# Altium PCB SkateBoardPCB.PcbDoc
Units mil, origin at the board's own origin, x right, y up, seen from the top; angles counter-clockwise.
Board outline 2755.91 x 1315 mil, 2 copper layers (Top Layer, Bottom Layer); 36 components, 35 nets, 205 pads, 0 vias.
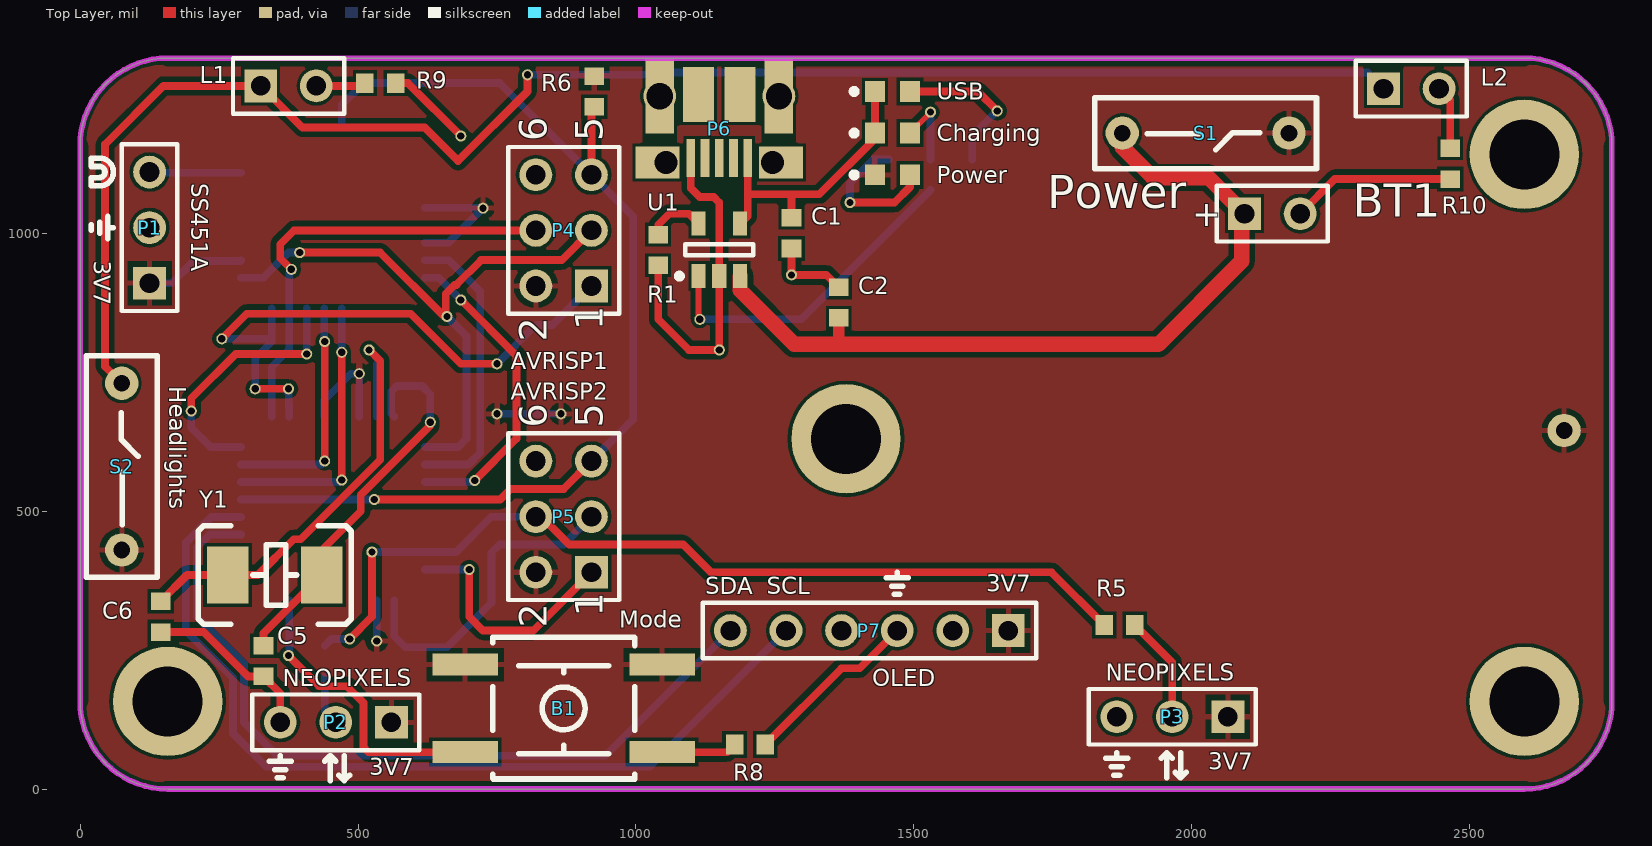
[diagram p0: Top Layer view]
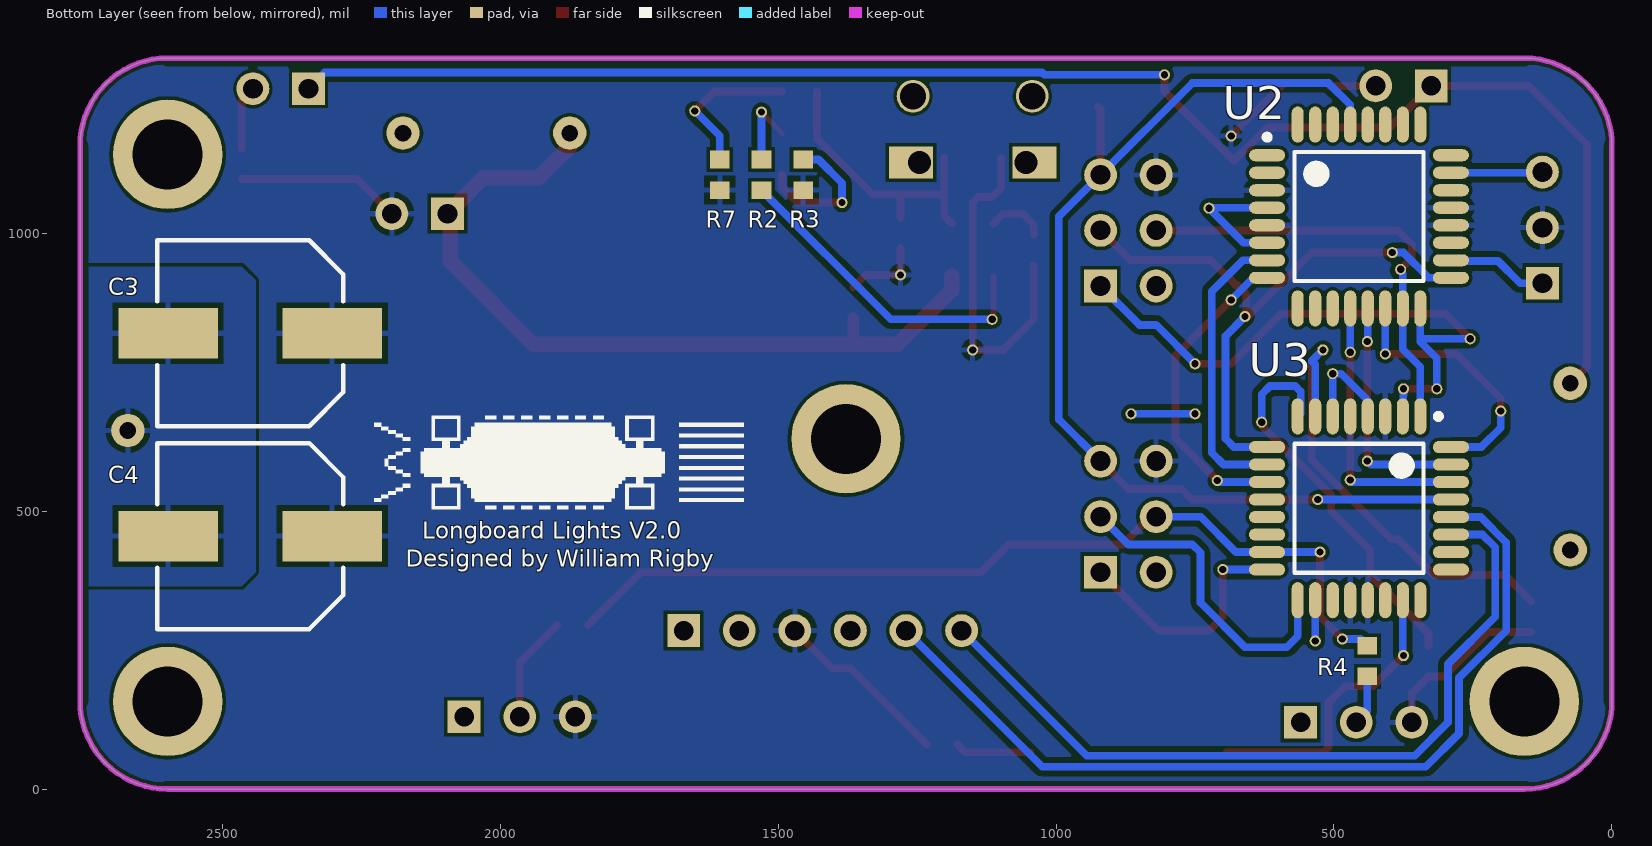
[diagram p1: Bottom Layer view, seen from below]

## Layer stack, top to bottom
Top Solder: solder mask 0.4, Solder Resist, Dk 3.5
Top Layer: signal copper 1.4
Dielectric 1: dielectric 12.6, FR-4, Dk 4.8
Bottom Layer: signal copper 1.4
Bottom Solder: solder mask 0.4, Solder Resist, Dk 3.5

## Board outline
0,157.48 0,1157.52 cw(c157.48,1157.52) 157.48,1315 2598.43,1315 cw(c2598.43,1157.52) 2755.91,1157.52 2755.91,157.48 cw(c2598.43,157.48) 2598.43,0 157.48,0 cw(c157.48,157.48)

## Design rules (kind name [scope] priority, off if disabled: settings)
Clearance [All] p1: gap=6 except(10: Track-Poly; 15: Track-Region)
HoleSize [All] p1: absolutevalues=TRUE maxlimit=196.85 minlimit=0.98 maxpercent=80.000 minpercent=20.000
MinimumSolderMaskSliver [All] p1: minsoldermaskwidth=0.4
PolygonConnect [All] p1: connectstyle=Relief reliefconductorwidth=10 reliefentries=4 polygonreliefangle="90 Angle" airgapwidth=10
RoomDefinition Sheet1 [InComponentClass('Sheet1')] p1: confinementstyle=ConfineIn formatcopy=TRUE lockcomponents=FALSE outline 0,0 2775,0 2775,1315 0,1315
RoutingVias [All] p1: holewidth=28 width=50 viastyle="Through Hole" minholewidth=28 minwidth=50 maxholewidth=28 maxwidth=50
SilkToSilkClearance [All] p1: silktosilkclearance=0.1
SilkToSolderMaskClearance [IsPad] p1: minsilkscreentomaskgap=0.4 clearancetoexposedcopper=TRUE
SolderMaskExpansion [All] p1: expansion=4
Width [All] p1: maxlimit=120 minlimit=6 preferedwidth=14
26 further rules are at their usual default settings.

## Components (designator, comment, footprint, x,y, rotation, side; value= is the part's Value field where it differs from the comment)
B1 "Mode" SPST-NO 870,145 r180 top
BT1 "Battery" BAT-2 2145,1035 r0 top
C1 "Cap Semi" 1608[0603] 1280,1000 r90 top
C2 "Cap Semi" 1608[0603] 1365,875 r270 top
C3 "Cap Semi" CAPAE9983X105M 2450,820 r0 bottom
C4 "Cap Semi" CAPAE9983X105M 2450,455 r0 bottom
C5 "Cap Semi" 1608[0603] 330,230 r90 top
C6 "Cap Semi" 1608[0603] 145,310 r90 top
Charging "LED" LED0603 1461.5,1180 r0 top
L1 "LED" HDR1X2 325,1265 r0 top
L2 "LED" HDR1X2 2345,1260 r0 top
P1 "SS451A" HDR1X3 125,910 r90 top
P2 "NEOPIXELS" HDR1X3 560,120 r180 top
P3 "NEOPIXELS" HDR1X3 2065,130 r180 top
P4 "AVRISP1" HDR2X3 920,905 r90 top
P5 "AVRISP2" HDR2X3 920,390 r90 top
P6 "USB Micro B Connector" "USB Micro B Connector" 1150,1246.5 r180 top
P7 "OLED" HDR1X6 1670,285 r180 top
Power "LED" LED0603 1461.5,1105 r0 top
R1 "Res1" 1608[0603] 1040,970 r90 top
R2 "Res1" 1608[0603] 1530,1105 r90 bottom
R3 "Res1" 1608[0603] 1455,1105 r90 bottom
R4 "Res1" 1608[0603] 440,230 r270 bottom
R5 "Res1" 1608[0603] 1870,295 r0 top
R6 "Res1" 1608[0603] 925,1255 r270 top
R7 "Res1" 1608[0603] 1605,1105 r90 bottom
R8 "Res1" 1608[0603] 1205,80 r180 top
R9 "Res1" 1608[0603] 540,1270 r180 top
R10 "Res1" 1608[0603] 2465,1125 r90 top
S1 "Power" "Slide Switch 2.54mm" 1875,1180 r0 top
S2 "Headlights" "Slide Switch 2.54mm" 75,430 r90 top
U1 "MCP73831T-5ACI/OT" SOT-23-OT5_N 1150,970 r90 top
U2 "ATmega328P-AU" 32A_N 455,1030 r180 bottom
U3 "ATmega328P-AU" 32A_N 455,505 r270 bottom
USB "LED" LED0603 1461.5,1255 r0 top
Y1 "16MHz Crystal" "16MHz Clock" 350,385 r180 top

## Footprints (in the part's own frame and the unit in brackets; to place one, negate y for a bottom-side part, rotate by r counter-clockwise, add the part's x,y. Pads: shape width x height; smd on the part's side, far side on the other; paste and mask are expansions set on the pad)
"16MHz Clock" [mm]
  rect 1.9x2.6 smd: 1(-2.15,0) 2(2.15,0)
  silkscreen extent -3.5,-2.25 3.5,2.25
32A_N [mm] "Thin QFP, 32-Leads, Body 7x7mm, Pitch 0.8mm, IPC Medium Density"
  oval 1.65x0.55 smd: 1(-4.2,2.8) 2(-4.2,2) 3(-4.2,1.2) 4(-4.2,0.4) 5(-4.2,-0.4) 6(-4.2,-1.2) 7(-4.2,-2) 8(-4.2,-2.8) 17(4.2,-2.8) 18(4.2,-2) 19(4.2,-1.2) 20(4.2,-0.4) 21(4.2,0.4) 22(4.2,1.2) 23(4.2,2) 24(4.2,2.8)
  oval 0.55x1.65 smd: 9(-2.8,-4.2) 10(-2,-4.2) 11(-1.2,-4.2) 12(-0.4,-4.2) 13(0.4,-4.2) 14(1.2,-4.2) 15(2,-4.2) 16(2.8,-4.2) 25(2.8,4.2) 26(2,4.2) 27(1.2,4.2) 28(0.4,4.2) 29(-0.4,4.2) 30(-1.2,4.2) 31(-2,4.2) 32(-2.8,4.2)
  silkscreen extent -4.33,-2.95 2.95,3.75, body extent -3.5,-3.5 3.5,3.5, height 1.2
1608[0603] [mm] "Chip Capacitor, Body 1.6x0.8mm, IPC High Density"
  rect 0.8x0.9 smd: 1(-0.7,0) 2(0.7,0)
  body extent -0.87,-0.48 0.87,0.48, height 1.3
BAT-2 [mm] "Battery; 2 Leads"
  rect 1.5x1.5 hole 0.9: 1(-1.27,0)
  round 1.5 hole 0.9: 2(1.27,0)
  silkscreen extent -2.54,-1.27 2.54,1.27
CAPAE9983X105M [mm] "Aluminum Electrolytic Capacitor, Body 8.30x8.30x10.50mm, IPC Low Density"
  rect 4.55x2.3 smd: 1(-3.75,0) 2(3.75,0)
  silkscreen extent -4.25,-4.25 4.25,4.25, body extent -4.25,-4.25 4.25,4.25, height 10.5
HDR1X2 [mm] "Connector; Header; 2 Position"
  rect 1.5x1.5 hole 0.9: 1(0,0)
  round 1.5 hole 0.9: 2(2.54,0)
  silkscreen extent -1.27,-1.27 3.81,1.27
HDR1X3 [mm] "Connector; Header; 3 Position"
  rect 1.5x1.5 hole 0.9: 1(0,0)
  round 1.5 hole 0.9: 2(2.54,0) 3(5.08,0)
  silkscreen extent -1.27,-1.27 6.35,1.27
HDR1X6 [mm] "Connector; Header; 6 Position"
  rect 1.5x1.5 hole 0.9: 1(0,0)
  round 1.5 hole 0.9: 2(2.54,0) 3(5.08,0) 4(7.62,0) 5(10.16,0) 6(12.7,0)
  silkscreen extent -1.27,-1.27 13.97,1.27
HDR2X3 [mm] "Connector; Header; 3x2 Position"
  rect 1.5x1.5 hole 0.9: 1(0,0)
  round 1.5 hole 0.9: 2(0,2.54) 3(2.54,0) 4(2.54,2.54) 5(5.08,0) 6(5.08,2.54)
  silkscreen extent -1.27,-1.27 6.35,3.81
LED0603 [mm]
  rect 0.9x0.95 smd: 1(-0.8,0) 2(0.8,0)
  silkscreen extent -1.87,-0.12 -1.62,0.12
"Slide Switch 2.54mm" [mil]
  round 60 hole 30: 1(0,0) 2(300,0)
  silkscreen extent -49,-64 349,64
SOT-23-OT5_N [mm] "SOT23, 5-Leads, Body 2.9x1.6mm, Pitch 0.95mm, Lead Span 2.7mm, IPC Medium Density"
  rect 1.1x0.65 smd: 1(-1.2,0.95) 2(-1.2,0) 3(-1.2,-0.95) 4(1.2,-0.95) 5(1.2,0.95)
  silkscreen extent -1.32,-1.55 0.25,1.95, body extent -0.9,-1.55 0.9,1.55, height 1.45
SPST-NO [mm]
  rect 3x1 smd: 1(-4.5,2) 2(-4.5,-2) 3(4.5,-2) 4(4.5,2)
  silkscreen extent -3.25,-3.25 3.25,3.23
"USB Micro B Connector" [mm]
  rect 0.4x1.75 smd: D+(0,2.825) D-(-0.65,2.825) GND(1.3,2.825) ID(0.65,2.825) VBUS(-1.3,2.825)
  rect 2x1.46 all layers, no hole: Mount(-2.825,3.03) Mount(2.825,3.03)
  round 1.5 hole 1.2: Mount(-2.725,0) Mount(2.725,0)
  rect 1.3x3.4 smd: Mount(-2.725,0) Mount(2.725,0)
  round 1.2 hole 1.05: Mount(-2.425,3.03) Mount(2.425,3.03)
  rect 1.425x2.5 smd: Mount(-0.95,-0.075) Mount(0.95,-0.075)

## Part data
B1: library part Switch
BT1: "Multicell Battery"
C1 C2 C3 C4 C5 C6: "Capacitor (Semiconductor SIM Model)"
Charging L1 L2 Power USB: library part LED3, "Typical BLUE SiC LED"
P1 P2 P3: library part "Header 3", "Header, 3-Pin"
P4 P5: library part AVRISP
P7: library part "Header 6", "Header, 6-Pin"
R1 R2 R3 R4 R5 R6 R7 R8 R9 R10: "Resistor"
S1 S2: library part "Slide Switch"
U1: "Miniature Single-Cell, Fully Integrated Li-Ion, Li-Polymer Charge Management Controller, 4.5V, 5-Pin SOT-23, Industrial Temperature, Tape and Reel"
U2 U3: "8-bit AVR Microcontroller, 32KB Flash, 1KB EEPROM, 2KB SRAM, 32-pin TQFP, Industrial Grade (-40°C to 85°C)"

## Free pads (board coordinates)
  round 20 hole 13: 2(200,680) 2(255,810) 2(315,720) 2(375,240) 2(375,720) 2(380,935) 2(395,965) 2(407.76,782.76) 2(440,590) 2(440,805) 2(470.75,555.75) 2(470.75,785.75) 2(485,270) 2(502.24,747.24) 2(520,790) 2(525,426.26) 2(529.25,520.75) 2(533.74,266.26) 2(630,660) 2(660,850) 2(685,880) 2(685,1175) 2(700,395) 2(710,555) 2(725,1045) 2(750,675) 2(750,765) 2(805,1285) 2(865,675) 2(1115,845) 2(1150,790) 2(1280,925) 2(1385,1055) 2(1530,1217.78) 2(1650,1220)
  round 60 hole 30: 3(2670,645)
  round 196.85 hole 125.98: 4(157.48,157.48) 4(1377.95,629.92) 4(2598.43,157.48) 4(2598.43,1141.73)

## Nets (pads, with @x,y where several pads share a name; then routed paths per layer and width w, separated by ;. In a path a pad name is that pad's centre, name@x,y a point inside that pad or via, vN(x,y) a via of type N, cw(c..) or ccw(c..) an arc to the next point about the centre after c; other vN are vias at no path point)
3.7V: B1.2 B1.3 C3.2 C4.2 P1.1 P2.1 P3.1 P4.2 P5.2 P7.1 pad.2@502.24,747.24 pad.2@533.74,266.26 pad.2@725,1045 pad.2@750,675 pad.2@865,675 pad.3 Power.1 R6.1 S1.2 S2.1 U2.4 U2.6 U2.18 U3.4 U3.6 U3.18 | length 794.2
  Bottom Layer w14: P1.1 165,910 205,950 288.39,950 U2.18 ; U3.4 439.25,699.25 487.24,747.24 502.24,747.24 U3.6 ; pad.2@533.74,266.26 U3.18 ; U2.6 662.76,982.76 725,1045 724.25,1045.75 U2.4 ; pad.2@750,675 pad.2@865,675
+5V: C1.2 Charging.1 P6.VBUS U1.4 USB.1 | length 521.4
  Top Layer w10: Charging.1@1430,1170 Charging.1
  Top Layer w14: U1.4 1201.18,1031.02 1201.18,1070 ; P6.VBUS 1201.18,1070 ; C1.2 1280,1070 ; Charging.1@1430,1170 1330,1070 1280,1070 ; Charging.1 USB.1 ; 1201.18,1070 1280,1070
"BUTTON 1": B1.4 pad.2@375,240 U3.23 | length 536.8
  Top Layer w14: pad.2@375,240 430,185 480,185 510,155 510,75 518.74,66.26 B1.4
  Bottom Layer w14: pad.2@375,240 376.26,241.26 U3.23
"BUTTON 2": U3.24
"DATA 0": pad.2@470.75,555.75 pad.2@470.75,785.75 U2.12 U3.30 | length 491.5
  Top Layer w14: pad.2@470.75,555.75 pad.2@470.75,785.75
  Bottom Layer w14: U3.30 467.24,552.24 pad.2@470.75,555.75 ; pad.2@470.75,785.75 U2.12
"DATA 1": pad.2@440,590 pad.2@440,805 U2.13 U3.31 | length 426.8
  Top Layer w14: pad.2@440,590 pad.2@440,805
  Bottom Layer w14: U3.31 433.74,583.74 pad.2@440,590 ; pad.2@439.25,805.75 U2.13
"DATA 2": pad.2@200,680 pad.2@407.76,782.76 U2.14 U3.32 | length 479.6
  Top Layer w14: pad.2@200,680 200,702.76 280,782.76 pad.2@407.76,782.76
  Bottom Layer w14: pad.2@200,680 200,650 234.76,615.24 U3.32 ; pad.2@407.76,782.76 U2.14
"DATA 3": P4.4 pad.2@380,935 U2.15 U3.1 | length 801.7
  Top Layer w14: pad.2@380,935 360,955 360,980 385,1005 P4.4
  Bottom Layer w14: U3.1 344.76,759.76 376.26,791.26 U2.15 376.26,927.32 pad.2@381.97,933.03
"DATA 4": P4.1 pad.2@255,810 pad.2@315,720 pad.2@375,720 pad.2@750,765 U2.16 U3.2 | length 1137.5
  Top Layer w14: pad.2@255,810 300,855 595,855 685,765 pad.2@750,765 ; pad.2@315,720 pad.2@375,720
  Bottom Layer w14: pad.2@255,810 339.53,810 344.76,804.76 ; pad.2@315,720 315,775 344.76,804.76 ; U2.16 344.76,804.76 ; pad.2@375,720 U3.2 ; pad.2@750,765 820,835 850,835 P4.1
"DATA 5": P4.3 pad.2@395,965 pad.2@660,850 U2.17 U3.9 | length 1103.1
  Top Layer w14: pad.2@395,965 540,965 655,850 660,850 658,852 658,891.18 673.82,907 677,907 721.53,951.53 866.53,951.53 P4.3
  Bottom Layer w14: U2.17 329.76,919.76 375,965 pad.2@395,965 ; U3.9 680.24,615.24 695,630 695,815 pad.2@660,850
"DATA 6": U2.7 U3.10 | length 521.4
  Bottom Layer w14: U3.10 698.74,583.74 720,605 720,895 663.74,951.26 U2.7
"DATA 7": pad.2@685,880 pad.2@710,555 U2.8 U3.11 | length 569.4
  Top Layer w14: pad.2@685,880 785,780 785,630 pad.2@710,555
  Bottom Layer w14: U3.11 707.24,552.24 pad.2@710,555 ; U2.8 645.24,919.76 pad.2@685,880
GND: BT1.2 C1.1 C2.1 C3.1 C4.1 C5.1 C6.1 P1.2 P2.3 P3.3 P4.6 P5.6 P6.GND P7.3 pad.2@685,1175 pad.2@1150,790 pad.2@1280,925 R1.1 R3.1 R7.1 R8.1 R9.1 R10.1 U1.2 U2.3 U2.5 U2.20 U2.21 U3.3 U3.5 U3.20 U3.21 | length 1844.5
  Top Layer w14: C6.1 222.56,282.44 302.56,202.44 C5.1 360,172.44 P2.3 ; R9.1 590,1270 pad.2@685,1175 ; R1.1 1040,845 1095,790 1150,790 U1.2 1150,1055 1140,1065 1115,1065 1098.82,1081.18 P6.GND ; R8.1 1370,217.44 1402.44,217.44 P7.3 ; C1.1 1280,925 1342.56,925 C2.1 ; P3.3@1862.56,127.56 P3.3 ; BT1.2 2257.44,1097.44 R10.1
"HALL EFFECT": P1.3 U2.23 | length 165.2
  Bottom Layer w14: P1.3 126.26,1108.74 U2.23
MISO2: P5.1 pad.2@700,395 U3.16 | length 438.6
  Top Layer w14: pad.2@700,395 700,310 725,285 815,285 P5.1
  Bottom Layer w14: U3.16 699.76,394.76 pad.2@700,395
MOSI2: P5.4 pad.2@485,270 pad.2@525,426.26 R4.1 R5.1 U3.15 | length 1647.6
  Top Layer w14: pad.2@485,270 525,310 pad.2@525,426.26 ; P5.4 830,490 880,440 1085,440 1135,390 1747.44,390 R5.1
  Bottom Layer w14: R4.1 452.44,270 pad.2@485,270 ; pad.2@525,426.26 U3.15 676.26,426.26 740,490 P5.4
NetB1_1: B1.1 R8.2 | length 136
  Top Layer w14: B1.1 1163.7,66.26 R8.2
NetC5_2: C5.2 pad.2@630,660 U3.8 Y1.1 | length 703.9
  Top Layer w14: C5.2 330,280.35 Y1.1 434.65,429.65 505,500 505,529.02 630,654.02 pad.2@630,660
  Bottom Layer w14: U3.8 560,675.59 560,715 570,725 615,725 630,710 pad.2@630,660
NetC6_2: C6.2 pad.2@520,790 U3.7 Y1.2 | length 836.9
  Top Layer w14: C6.2 192.44,385 Y1.2 320.06,385 384.24,449.18 396.71,449.18 540,592.47 540,770 pad.2@520,790
  Bottom Layer w14: pad.2@520,790 540,770 533.74,763.74 U3.7
NetCharging_2: Charging.2 pad.2@1530,1217.78 R2.2 | length 138.3
  Top Layer w10: Charging.2 1530,1217.01 pad.2@1530,1217.78
  Bottom Layer w14: R2.2 pad.2@1530,1217.78
NetL1_1: L1.1 L2.1 pad.2@805,1285 S2.2 | length 2937.3
  Top Layer w14: S2.2 45,760 45,1160 150,1265 L1.1 400,1190 620,1190 680,1130 805,1255 pad.2@805,1285
  Bottom Layer w14: pad.2@805,1285 1021.08,1285 1025.1,1289.02 2315.98,1289.02 L2.1
NetL1_2: L1.2 R9.2 | length 89.5
  Top Layer w14: L1.2 507.44,1265 R9.2
NetL2_2: L2.2 R10.2 | length 87.4
  Top Layer w14: R10.2 L2.2@2465,1240
NetP2_2: P2.2 R4.2 | length 90.7
  Bottom Layer w14: R4.2 440,140 P2.2
NetP3_2: P3.2 R5.2 | length 192.9
  Top Layer w14: R5.2 1965,227.56 P3.2
NetPower_2: pad.2@1385,1055 Power.2 R3.2 | length 264.2
  Top Layer w14: pad.2@1385,1055 1465,1055 1492.99,1082.99 Power.2
  Bottom Layer w14: pad.2@1385,1055 1385,1090 1427.56,1132.56 R3.2
NetR1_2: R1.2 U1.5 | length 105.7
  Top Layer w14: R1.2 1040,1015 1060,1035 1094.84,1035 U1.5
NetR2_1: pad.2@1115,845 R2.1 U1.1 | length 590
  Top Layer w10: U1.1 1112.6,847.4 pad.2@1115,845
  Bottom Layer w14: pad.2@1115,845 1297.56,845 R2.1
NetR7_2: pad.2@1650,1220 R7.2 USB.2 | length 277.6
  Top Layer w14: USB.2 1615,1255 pad.2@1650,1220
  Bottom Layer w14: R7.2 1605,1175 pad.2@1650,1220
"OLED RST": U3.26
RESET: P4.5 P5.5 pad.2@529.25,520.75 R6.2 U2.29 U3.29 | length 1929.9
  Top Layer w14: pad.2@529.25,520.75 755.75,520.75 775,540 870,540 P5.5 ; P4.5 920,1222.44 R6.2
  Bottom Layer w14: U3.29 pad.2@529.25,520.75 ; U2.29 470.75,1230.75 510,1270 755,1270 P4.5 995,1030 995,665 P5.5
SCK2: P5.3 U3.17 | length 587.9
  Bottom Layer w14: U3.17 565.24,274.76 585,255 660,255 740,335 740,425 755,440 870,440 P5.3 P5.3@910,490
SCL: P7.5 U3.28 | length 1618.5
  Bottom Layer w14: U3.28 235.97,489.25 190,443.28 190,285 275,200 275,100 335,40 1025,40 P7.5
SDA: P7.6 U3.27 | length 1432.3
  Bottom Layer w14: U3.27 232.76,457.76 210,435 210,310 295,225 295,120 355,60 945,60 P7.6
VBAT: BT1.1 C2.2 S1.1 U1.3 | length 1455.4
  Top Layer w20: 1365,800 C2.2
  Top Layer w28: U1.3 1187.4,897.6 1285,800 1365,800 1940,800 2090,950 2090,1040 2030,1100 1930,1100 1875,1155 S1.1
pads on no net: P6.D+ P6.D- P6.ID P6.Mount P7.2 P7.4 U2.1 U2.2 U2.9 U2.10 U2.11 U2.19 U2.22 U2.24 U2.25 U2.26 U2.27 U2.28 U2.30 U2.31 U2.32 U3.12 U3.13 U3.14 U3.19 U3.22 U3.25

## Polygon pours and split planes (outlines as drawn)
3.7V on Top Layer "Top Layer-3V7" (solid, pour order 2): 157.48,0 2670,0 2680,10 2745,75 2745,80 2745,95 2750,100 2755.91,105.91 2755.91,157.48 2755.91,1229.09 2745,1240 2710,1275 2710,1280 2675,1315 2598.43,1315 135,1315 125,1315 105,1315 95,1305 90,1300 70,1300 70,1295 50,1275 35,1260 25,1260 25,1240 15,1230 0,1215 0,1195 0,1165 0,145 0,110 5,105 10,100 10,75 25,60 55,30 55,25 75,25 90,10 100,0 125,0
3.7V on Bottom Layer "3.7V_L02_P000" (solid, pour order 0): 2440,915 2465,940 2690,940 2755.91,940 2755.91,365 2690,365 2465,365 2440,390
GND on Bottom Layer "Bottom Layer GND" (solid, remove dead copper, pour order 4): 90,-5 2715,-5 2725,5 2785,65 2785,290 2785,1310 2780,1315 2765,1330 55,1330 50,1330 -25,1255 -20,1250 -20,110

## Keep-outs
Keep-Out Layer:
  the board outline again, w10

## Silkscreen, mask and mechanical layers (free items; w line width, h text height)
Top Overlay:
  lines w10: 20,1005 20,1015 ; 35,1000 35,1010 35,1020 ; 50,990 50,1010 ; 50,1030 50,1010 ; 60,1010 50,1010 ; 340,50 360,50 ; 350,35 360,35 370,35 ; 355,20 365,20 ; 360,60 360,50 ; 380,50 360,50 ; 440,50 450,60 ; 450,15 450,60 ; 460,50 450,60 ; 465,25 475,15 ; 475,60 475,15 ; 485,25 475,15 ; 1450,380 1470,380 ; 1460,365 1470,365 1480,365 ; 1465,350 1475,350 ; 1470,390 1470,380 ; 1490,380 1470,380 ; 1845,55 1865,55 ; 1855,40 1865,40 1875,40 ; 1860,25 1870,25 ; 1865,65 1865,55 ; 1885,55 1865,55 ; 1945,55 1955,65 ; 1955,20 1955,65 ; 1965,55 1955,65 ; 1970,30 1980,20 ; 1980,65 1980,20 ; 1990,30 1980,20 ; 20,1085 20,1100 35,1100 ccw(c35,1110) 35,1120 20,1120 20,1135 35,1135 cw(c35,1110) 35,1085 20,1085
  text "3V7" at 25,950 h30 r270
  text "3V7" at 1630,355 h30
  text "SDA" at 1125,350 h30
  text "SCL" at 1235,350 h30
  text "3V7" at 2030,35 h30
  text "3V7" at 520,25 h30
Bottom Overlay:
  drawing of 33 lines, arcs and shapes, not listed
  text "Longboard Lights V2.0" at 2140,450 h30
  text "Designed by William Rigby" at 2170,400 h30

## Text inside footprints (layer, text, board x,y; h text height)
BT1: Top Overlay "+" at 2000.51,1012.28 h45.28
P4: Top Overlay "1" at 940,825 h50 r90; Top Overlay "2" at 840,805 h50 r90; Top Overlay "5" at 940,1165 h50 r90; Top Overlay "6" at 840,1165 h50 r90
P5: Top Overlay "1" at 940,310 h50 r90; Top Overlay "2" at 840,290 h50 r90; Top Overlay "5" at 940,650 h50 r90; Top Overlay "6" at 840,650 h50 r90